# EAGLE board expand (EAGLE 5.10)
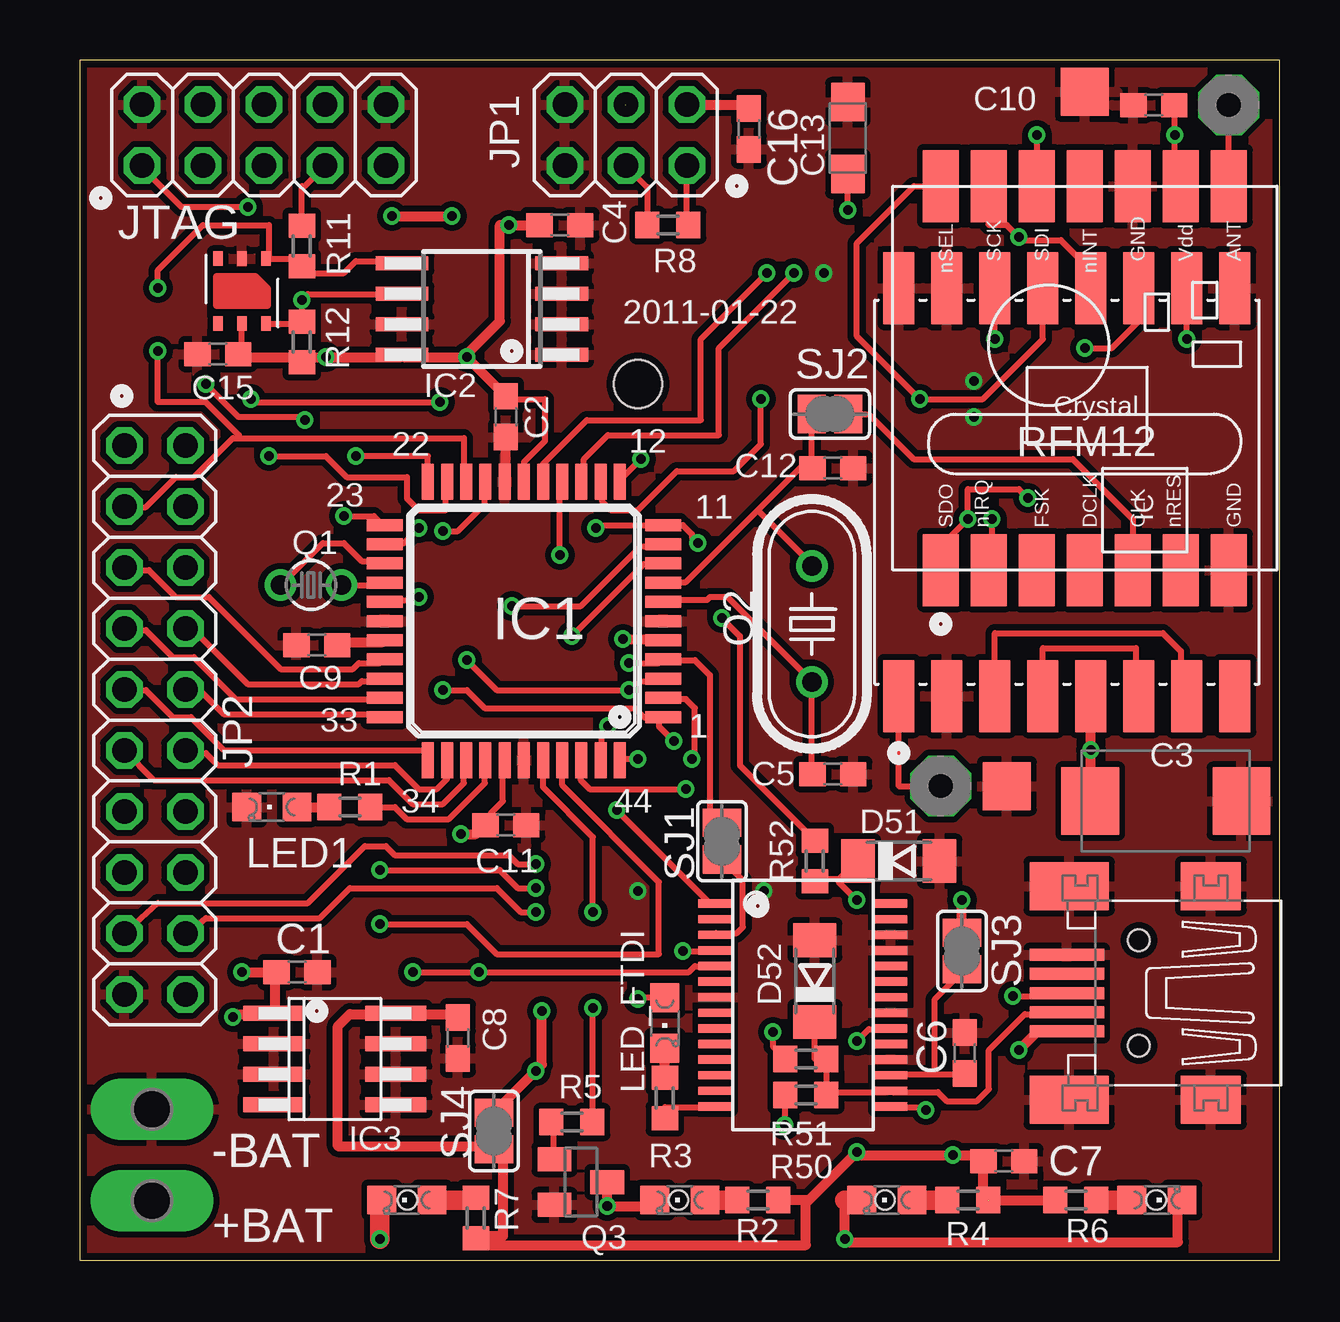
[diagram p0: board, top side]
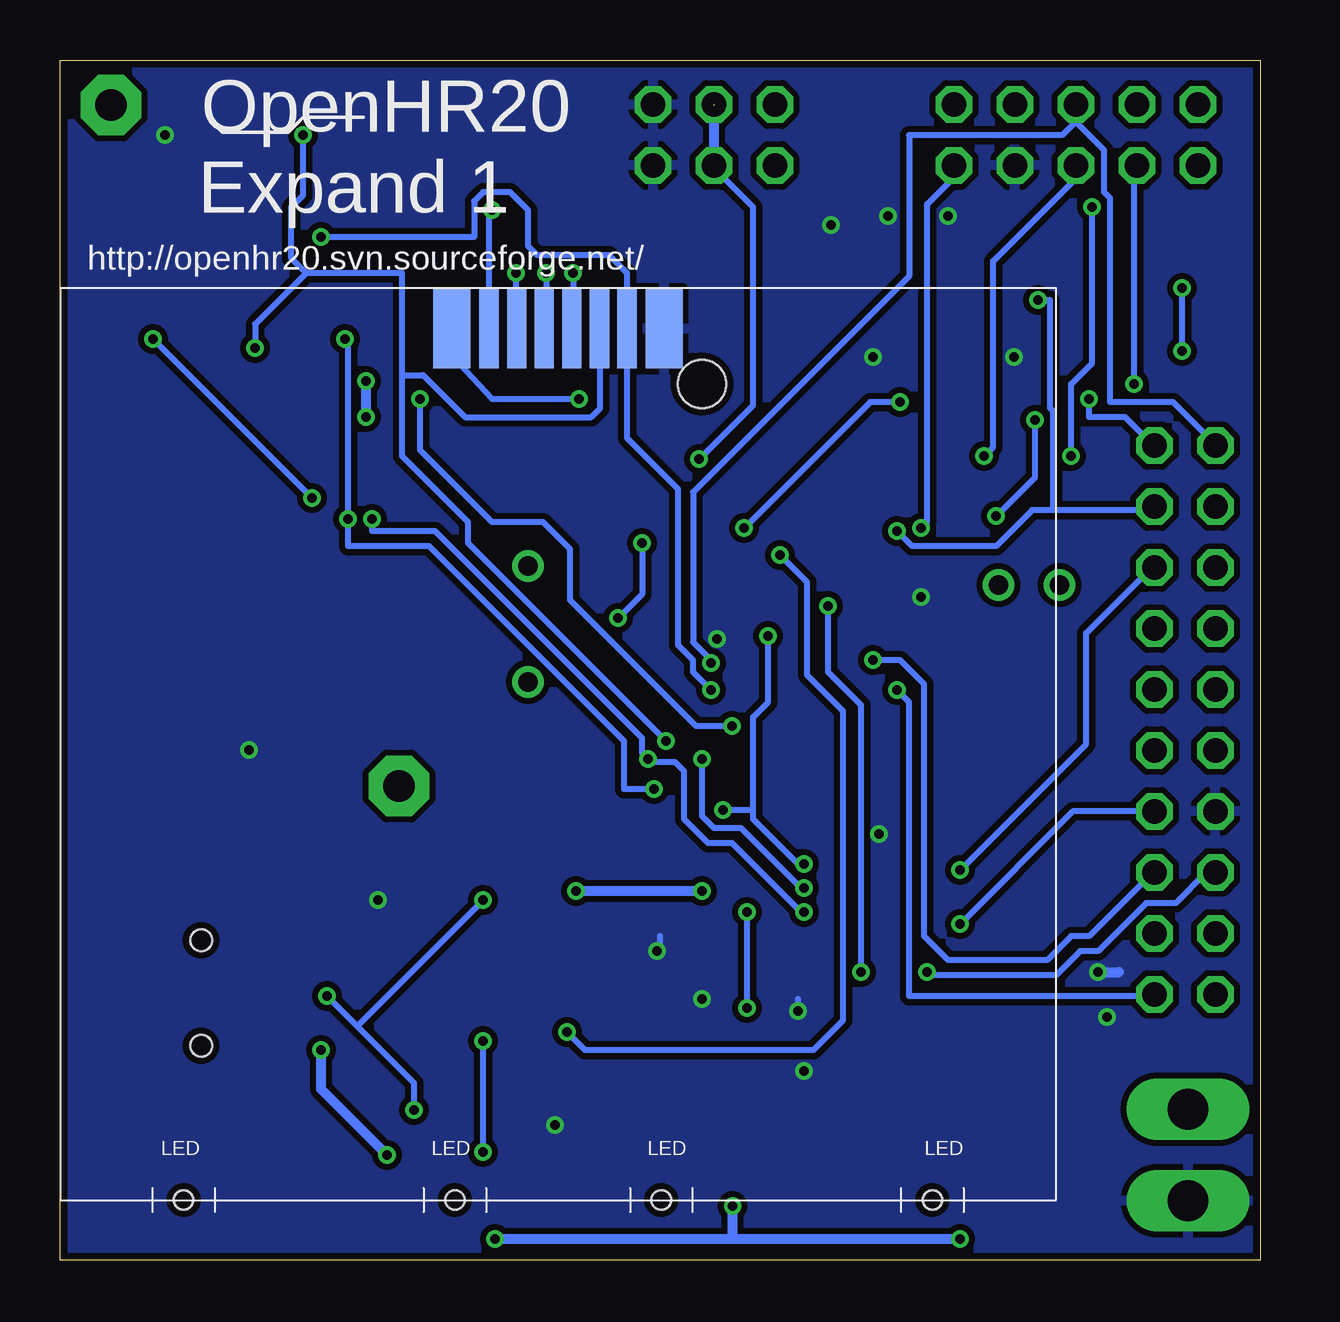
[diagram p1: board, bottom side, seen from below]

Size 50 x 50 mm. Coordinates in mm from the lower left corner, seen from the top.
Outline: 0,0 50,0 50,50 0,50 0,0
Copper layers (1*16): Top 0.035mm / dielectric 1.5mm / Bottom 0.035mm
Design rules "rules": minimum track width 10mil, minimum drill 16mil, track to track 10mil, track to pad 10mil, pad to pad 10mil, via to via 10mil, smd to smd 0mil, copper to edge 12mil, drill to drill 12mil, minimum pad ring 10mil, minimum via ring 6mil, stop-mask expansion 2mil, vias tented up to drill 100mil, thermal gap 10mil

## Footprints (pad centres in the part's own frame; a part is rotated, then mirrored left to right if it is on the bottom)
PAD-01 = drill 1.3 pad 2.54 octagon: 1 0,0
TP20SQ = smd 2 x 2: TP 0,0
P2-38-17 = drill 1.702 pad 2.121 long: TP-1 -1.905,0; TP-2 1.905,0
C0603 = smd 1.1 x 1: 1 -0.85,0; 2 0.85,0
SMC_D = smd 2.4 x 2.8: + -3.15,0; - 3.15,0
SMC_A = smd 1.6 x 1.4: + -1.5,0; - 1.5,0
SOD80C = smd 1.4 x 1.8: A 1.7,0; C -1.7,0
TQFP44 = smd 1.5 x 0.5: 1 -5.8,4; 2 -5.8,3.2; 3 -5.8,2.4; 4 -5.8,1.6; 5 -5.8,0.8; 6 -5.8,0; 7 -5.8,-0.8; 8 -5.8,-1.6; 9 -5.8,-2.4; 10 -5.8,-3.2; 11 -5.8,-4; 23 5.8,-4; 24 5.8,-3.2; 25 5.8,-2.4; 26 5.8,-1.6; 27 5.8,-0.8; 28 5.8,0; 29 5.8,0.8; 30 5.8,1.6; 31 5.8,2.4; 32 5.8,3.2; 33 5.8,4 | smd 0.5 x 1.5: 12 -4,-5.8; 13 -3.2,-5.8; 14 -2.4,-5.8; 15 -1.6,-5.8; 16 -0.8,-5.8; 17 0,-5.8; 18 0.8,-5.8; 19 1.6,-5.8; 20 2.4,-5.8; 21 3.2,-5.8; 22 4,-5.8; 34 4,5.8; 35 3.2,5.8; 36 2.4,5.8; 37 1.6,5.8; 38 0.8,5.8; 39 0,5.8; 40 -0.8,5.8; 41 -1.6,5.8; 42 -2.4,5.8; 43 -3.2,5.8; 44 -4,5.8
SO-08M = smd 0.6 x 2.2: 1 -1.905,-3.33; 2 -0.635,-3.33; 3 0.635,-3.33; 4 1.905,-3.33; 5 1.905,3.33; 6 0.635,3.33; 7 -0.635,3.33; 8 -1.905,3.33
SO08 = smd 0.635 x 2.54: 1 -1.905,-2.54; 2 -0.635,-2.54; 3 0.635,-2.54; 4 1.905,-2.54; 5 1.905,2.54; 6 0.635,2.54; 7 -0.635,2.54; 8 -1.905,2.54
2X03 = drill 1.016 octagon: 1 -2.54,-1.27; 2 -2.54,1.27; 3 0,-1.27; 4 0,1.27; 5 2.54,-1.27; 6 2.54,1.27
2X10 = drill 1.016 octagon: 1 -11.43,-1.27; 2 -11.43,1.27; 3 -8.89,-1.27; 4 -8.89,1.27; 5 -6.35,-1.27; 6 -6.35,1.27; 7 -3.81,-1.27; 8 -3.81,1.27; 9 -1.27,-1.27; 10 -1.27,1.27; 11 1.27,-1.27; 12 1.27,1.27; 13 3.81,-1.27; 14 3.81,1.27; 15 6.35,-1.27; 16 6.35,1.27; 17 8.89,-1.27; 18 8.89,1.27; 19 11.43,-1.27; 20 11.43,1.27
2X05 = drill 1.016 octagon: 1 -5.08,-1.27; 2 -5.08,1.27; 3 -2.54,-1.27; 4 -2.54,1.27; 5 0,-1.27; 6 0,1.27; 7 2.54,-1.27; 8 2.54,1.27; 9 5.08,-1.27; 10 5.08,1.27
CHIPLED_0805 = smd 1.2 x 1.2: A 0,-1.05; C 0,1.05
TC26V = drill 0.813 round: 1 -1.27,0; 2 1.27,0
HC49U-V = drill 0.813 round: 1 -2.413,0; 2 2.413,0
SOT23-BEC = smd 1 x 1.4: B -0.95,-1.1; C 0,1.1; E 0.95,-1.1
R0603 = smd 1 x 1.1: 1 -0.85,0; 2 0.85,0
SJ = smd 1.168 x 1.6: 1 -0.762,0; 2 0.762,0
SSOP28DB = smd 0.348 x 1.397: 1 -4.225,-3.656; 2 -3.575,-3.656; 3 -2.925,-3.656; 4 -2.275,-3.656; 5 -1.625,-3.656; 6 -0.975,-3.656; 7 -0.325,-3.656; 8 0.325,-3.656; 9 0.975,-3.656; 10 1.625,-3.656; 11 2.275,-3.656; 12 2.925,-3.656; 13 3.575,-3.656; 14 4.225,-3.656; 15 4.225,3.656; 16 3.575,3.656; 17 2.925,3.656; 18 2.275,3.656; 19 1.625,3.656; 20 0.975,3.656; 21 0.325,3.656; 22 -0.325,3.656; 23 -0.975,3.656; 24 -1.625,3.656; 25 -2.275,3.656; 26 -2.925,3.656; 27 -3.575,3.656; 28 -4.225,3.656
RFM12 = smd 1.5 x 3: 1 -5,-10; 2 -3,-10; 3 -1,-10; 4 1,-10; 5 3,-10; 6 5,-10; 7 7,-10; 8 7,6; 9 5,6; 10 3,6; 11 1,6; 12 -1,6; 13 -3,6; 14 -5,6
RFM22-XXX-S2 = smd 3 x 1.3: 1 -8.5,7; 2 -8.5,5; 3 -8.5,3; 4 -8.5,1; 5 -8.5,-1; 6 -8.5,-3; 7 -8.5,-5; 8 -8.5,-7; 9 8.5,-7; 10 8.5,-5; 11 8.5,-3; 12 8.5,-1; 13 8.5,1; 14 8.5,3; 15 8.5,5; 16 8.5,7
SHT21 = smd 0.6 x 0.4: NC1 1.35,1; NC2 -1.35,1; SCL -1.35,-1; SDA 1.35,-1; VDD -1.35,0; VSS 1.35,0
LPH7677 = smd 1.55 x 3.3: 1VDD 4.425,17.3; 8RES -4.425,17.3 | smd 0.8 x 3.3: 2SCLK 2.875,17.3; 3SDIN 1.725,17.3; 4D/C 0.575,17.3; 5SCE -0.575,17.3; 6GND -1.725,17.3; 7VOUT -2.875,17.3 | hole 2: 6,15 | hole 0.8: -15.6,-19; -4.3,-19; 4.3,-19; 15.6,-19
32005-301 = smd 3.1 x 0.5: 1 3,1.6; 2 3,0.8; 3 3,0; 4 3,-0.8; 5 3,-1.6 | smd 2.5 x 2: M1 -3,-4.45; M2 -3,4.45 | smd 3.3 x 2: M3 2.9,4.45; M4 2.9,-4.45 | hole 0.9: 0,2.2; 0,-2.2

## Placement (x,y rotation side)
ANT1  ANT  [PAD-01]  47.88,48.12 0 top
ANT2  ANT  [PAD-01]  35.88,19.75 0 top
ANT_GND  TPTP20SQ  [TP20SQ]  41.88,48.67 0 top
ANT_GND1  TPTP20SQ  [TP20SQ]  38.62,19.75 0 top
BAT  TP2P2-38-17  [P2-38-17]  3,4.38 90 top
C1  100n  [C0603]  9.05,12 0 top
C2  100n  [C0603]  17.75,35.14 270 top
C3  47u  [SMC_D]  45.25,19.12 0 top
C4  100n  [C0603]  20,43.12 0 top
C5  18p  [C0603]  31.38,20.25 0 top
C6  100n  [C0603]  36.88,8.62 90 top
C7  100n  [C0603]  38.5,4.12 0 top
C8  100n  [C0603]  15.75,9.25 270 top
C9  100n  [C0603]  9.88,25.62 0 top
C10  100n  [C0603]  44.75,48.12 0 top
C11  100n  [C0603]  17.75,18.12 0 top
C12  18p  [C0603]  31.38,33 180 top
C13  4u7  [SMC_A]  32,46.75 90 top
C15  100n  [C0603]  5.75,37.75 180 top
C16  100n  [C0603]  27.88,47.12 270 top
D51  BZV55C36  [SOD80C]  34.12,16.62 0 top
D52  BZV55C36  [SOD80C]  30.62,11.62 90 top
IC1  MEGA32-A  [TQFP44]  18.5,26.62 180 top
IC2  24Cxx  [SO-08M]  16.75,39.62 90 top
IC3  LE33CD  [SO08]  10.62,8.38 270 top
JP1  1WIRE  [2X03]  22.75,46.88 180 top
JP2  M05X2PTH  [2X10]  3.12,22.5 270 top
JTAG  M05X2PTH  [2X05]  7.67,46.88 0 top
LED1  [CHIPLED_0805]  8,18.88 90 top
LED3  [CHIPLED_0805]  25,2.5 90 top
LED4  [CHIPLED_0805]  33.62,2.5 90 top
LED5  [CHIPLED_0805]  44.88,2.5 270 top
LED6  [CHIPLED_0805]  13.62,2.5 90 top
LED_FTDI  RX/TX  [CHIPLED_0805]  24.38,9.88 180 top
Q1  32768Hz  [TC26V]  9.62,28.12 0 top
Q2  [HC49U-V]  30.5,26.5 270 top
Q3  BC817-25SMD  [SOT23-BEC]  20.88,3.25 270 top
R1  [R0603]  11.25,18.88 0 top
R2  [R0603]  28.25,2.5 0 top
R3  [R0603]  24.38,6.75 270 top
R4  [R0603]  37,2.5 0 top
R5  4k7  [R0603]  20.5,5.75 180 top
R6  [R0603]  41.5,2.5 180 top
R7  [R0603]  16.5,1.75 270 top
R8  10k  [R0603]  24.5,43.12 0 top
R11  47k  [R0603]  9.25,42.25 270 top
R12  47k  [R0603]  9.25,38.25 90 top
R50  1k5  [R0603]  30.25,6.88 180 top
R51  68  [R0603]  30.25,8.38 180 top
R52  68  [R0603]  30.62,16.62 90 top
SJ1  RTS->RESET  [SJ]  26.75,17.45 90 top
SJ2  RFM_CLK  [SJ]  31.25,35.25 180 top
SJ3  FTDI_PWR  [SJ]  36.75,12.88 90 top
SJ4  BAT_PWR  [SJ]  17.25,5.38 270 top
U1  FT232RL  [SSOP28DB]  30.12,10.62 270 top
U$1  RFM12_SMDSMD  [RFM12]  40.88,38.75 0 top
U$2  RFM22  [RFM22-XXX-S2]  41.12,32 90 top
U$3  SHT21  [SHT21]  6.75,40.38 90 top
W1  LPH7677  [LPH7677]  29.25,21.5 0 bottom
X2  MINI-USB-SCHIELD-32005-301  [32005-301]  44.12,11.12 180 top

## Library data of the parts
ANT1 ANT2 = OpenHR20_master
ANT_GND ANT_GND1 BAT = testpad
C1-C12 C15 C16 R1-R8 R11 R12 R50-R52 = resistor
C13 = rcl
D51 D52 = diode
IC1 = atmel
IC2 = microchip
IC3 = lexxab
JP1 JP2 JTAG = pinhead
LED1 LED3-LED6 LED_FTDI = led
Q1 Q2 = crystal
Q3 = transistor-npn
SJ1-SJ4 = jumper
U1 = ftdichip-3
U$1 = rfm_12
U$2 = SparkFun
U$3 = sht21
W1 = lcd_n3200_lph7677
X2 = con-cypressindustries

## Nets
!RESET: IC1.4 JP2.1 JTAG.6 SJ1.2
CLK: SJ2.1 U$1.5
GND: ANT_GND1.TP ANT_GND.TP BAT.TP-2 C1.2 C2.2 C3.- C4.2 C5.2 C6.2 C7.2 C8.2 C9.1 C10.1 C11.2 C12.1 C13.- C15.2 C16.2 D51.A D52.A IC1.6 IC1.18 IC1.28 IC1.39 IC2.1 IC2.2 IC2.3 IC2.4 IC2.7 IC3.2 IC3.3 IC3.5 IC3.6 IC3.7 JP1.5 JP1.6 JP2.19 JTAG.2 JTAG.10 LED1.C Q3.E U1.7 U1.18 U1.21 U1.25 U1.26 U$1.7 U$1.10 U$2.2 U$2.9 U$2.15 U$2.16 U$3.VSS W1.6GND X2.5 X2.M1 X2.M2 X2.M3 X2.M4
INT0: IC1.11 JP2.2 R52.2
INT1_1W: IC1.12 JP1.3 JP1.4 R8.1
L_DC: IC1.16 W1.4D/C
L_RES: IC1.13 W1.8RES
LED1: IC1.40 R5.1
LED2: IC1.37 R1.2
N$1: LED3.A R2.1
N$2: Q3.B R5.2
N$3: LED4.A R4.1
N$4: LED5.A R6.1
N$5: U$2.4 U$2.6
N$6: C6.1 SJ3.1 U1.17
N$10: LED_FTDI.C R3.1
N$11: R3.2 U1.14
N$12: LED1.A R1.1
N$14: SJ1.1 U1.3
N$15: C9.2 IC1.29
N$16: U$2.3 U$2.7
N$17: ANT1.1 U$1.8
N$18: IC1.25 Q1.1
N$19: LED6.A R7.1
N$20: IC1.26 Q1.2
N$21: LED3.C LED4.C LED5.C LED6.C Q3.C
N$22: C13.+ W1.7VOUT
N$24: C5.1 IC1.7 Q2.2
N$25: ANT2.1 U$2.1
N$26: C12.2 IC1.8 Q2.1 SJ2.2
NIRQ: IC1.42 U$1.2 U$2.14
PA1: IC1.36 JP2.11
PA2: IC1.35 JP2.12
PA3: IC1.34 JP2.9
PA4: IC1.33 JP2.10
PA5: IC1.32 JP2.7
PA6: IC1.31 JP2.8
PA7: IC1.30 JP2.5
RXD: IC1.9 JP2.17 U1.1
SCK: IC1.3 JP2.16 U$1.13 U$2.12 W1.2SCLK
SCL: IC1.19 IC2.6 JP2.4 R12.2 U$3.SCL
SDA: IC1.20 IC2.5 JP2.3 R11.2 U$3.SDA
SDI: IC1.1 JP2.20 U$1.12 U$2.11 W1.3SDIN
SDO: IC1.2 JP2.18 U$1.1 U$2.10
SEL1: IC1.43 U$1.14 U$2.13
SEL2: IC1.14 W1.5SCE
SEL3: IC1.44 JP2.6
T1: IC1.41 JP2.14
TCK: IC1.21 JTAG.1
TDI: IC1.24 JTAG.9
TDO: IC1.23 JTAG.3
TMS: IC1.22 JTAG.5
TXD: IC1.10 JP2.15 U1.5
USBDM: D52.C R50.1 R51.1 U1.16 X2.2
USBDP: D51.C R52.1 U1.15 X2.3
V_USB: C7.1 C8.1 IC3.8 R2.2 R4.2 R6.2 R7.2 SJ4.2 U1.20 X2.1
VCC: BAT.TP-1 C1.1 C2.1 C3.+ C4.1 C10.2 C11.1 C15.1 C16.1 IC1.5 IC1.17 IC1.27 IC1.38 IC2.8 IC3.1 JP1.1 JP1.2 JP2.13 JTAG.7 LED_FTDI.A R8.2 R11.1 R12.1 R50.2 SJ3.2 SJ4.1 U1.4 U$1.9 U$2.5 U$3.VDD W1.1VDD
VUSB1: IC1.15 R51.2

## Tracks (layer width: path | path; a pad name or v marks a point on that pad's centre or on a via)
!RESET  (via drill 0.41)
  Top 0.254: v22.88,24.88 24.12,24.88 24.25,25 IC1.4 24.32,25 25.62,25 26.25,24.38 26.25,18.71 SJ1.2
  Bottom 0.254: JP2.1 1.88,34 3.62,35.75 6.25,35.75 6.25,44.25 6.5,44.5 6.5,46.25 7.62,47.38 7.62,48.25 JTAG.6 7.75,48.25 7.75,47.38 8.25,46.88 14.62,46.88 14.62,41 23.62,32 23.62,25.75 22.88,25 v22.88,24.88
CLK
  Top 0.254: SJ2.1 32.88,35.25 34.75,33.38 41.38,33.38 43.88,30.88 U$1.5
GND  (via drill 0.41)
  Top 0.254: IC1.18 17.75,32.42 | U$1.10 43.88,43.88
  Top 0.406: 17.75,32.42 C2.2
  Bottom 0.254: v31,41.12 31,38.88 W1.6GND
  Bottom 0.406: v37.25,35.12 v37.25,36.62 | v23.25,15.38 v28.5,15.38
  pour Top: 0,50 50,50 50,0 0,0
INT0  (via drill 0.41)
  Top 0.254: v26.75,26.75 27.5,26 27.5,20.62 30.62,17.5 R52.2 | v25.75,29.88 25.5,30.12 25.5,30.25 25.12,30.62 IC1.11 21.62,30.62 v21.5,30.5 | v15,35.75 7.25,35.75 v7.12,35.88
  Bottom 0.254: v7.12,35.88 7.12,35.12 5.62,35.12 4.5,34 JP2.2 | v26.75,26.75 25.75,27.75 v25.75,29.88 | v15,35.75 16.25,35.75 v21.5,30.5
INT1_1W  (via drill 0.41)  (1 unrouted)
  Top 0.254: v23.38,33.38 22.5,32.5 IC1.12 | R8.1 23.65,44.7 JP1.4
  Bottom 0.254: v23.38,33.38 21.12,35.62 21.12,43.88 22.25,45 JP1.4 22.75,45.62
  Bottom 0.406: 22.75,45.62 22.75,48.12
L_DC  (via drill 0.41)
  Top 0.254: v28.62,41.12 25.88,38.38 25.88,35 21.12,35 19.3,33.17 IC1.16
  Bottom 0.254: W1.4D/C 28.62,38.75 v28.62,41.12
L_RES  (via drill 0.41)
  Top 0.254: IC1.13 21.75,32.38 21.75,31.62 22.12,31.25 23.25,31.25 24.88,32.88 27.25,32.88 28.38,34 v28.38,35.88
  Bottom 0.254: v28.38,35.88 32,35.88 33.62,37.62 33.62,38.75 W1.8RES
LED1  (via drill 0.41)
  Top 0.254: IC1.40 19.3,19.7 21.38,17.62 v21.38,14.5 | v21.38,10.5 21.38,5.78 R5.1
  Bottom 0.254: v21.38,10.5 v21.38,14.5
LED2
  Top 0.254: R1.2 13.12,18.88 13.62,18.38 15.38,18.38 16.88,19.88 16.88,20.8 IC1.37
N$1
  Top 0.813: LED3.A R2.1
N$2
  Top 0.254: Q3.B 19.75,4.25 | Q3.B 19.75,4.38 | Q3.B 19.75,4.5 | R5.2 19.75,5.75 19.75,4.62 Q3.B
N$3
  Top 0.254: LED4.A 34.62,2.5
  Top 0.813: 34.62,2.5 R4.1
N$4
  Top 0.813: R6.1 LED5.A
N$5
  Top 0.254: U$2.4 40.12,25.5 44,25.5 44,24.38 44.12,24.25 U$2.6
N$6
  Top 0.254: 35.62,7.75 33.88,7.75 U1.17 | 35.62,7.75 36.88,7.75 C6.1 | SJ3.1 36.75,12 35.62,10.88 35.62,7.75
N$10
  Top 0.406: R3.1 LED_FTDI.C
N$11
  Top 0.254: R3.2 24.38,6.38 26.38,6.38 U1.14
N$12
  Top 0.406: LED1.A R1.1
N$14
  Top 0.254: U1.3 26.5,13.62 27.38,13.62 27.62,13.88 27.62,15.81 SJ1.1
N$15
  Top 0.254: 10.88,25.75 10.75,25.62 C9.2 | 12.62,25.75 IC1.29
  Top 0.406: 10.88,25.75 12.62,25.75
N$16
  Top 0.254: U$2.3 38.12,26.12 45.12,26.12 45.88,25.38 45.88,23.5 U$2.7
N$17
  Top 0.254: U$1.8 ANT1.1
N$18
  Top 0.254: IC1.25 12.62,29.12 11.75,29.12 11,29.88 10.12,29.88 8.38,28.12 Q1.1
N$19
  Top 0.813: LED6.A 16.4,2.5 R7.1
N$20
  Top 0.254: IC1.26 12.62,28.12 Q1.2
N$21  (via drill 0.41)
  Top 0.254: 45.75,2.5 LED5.C | 24.12,2.25 LED3.C | v31.88,0.88 32,0.75
  Top 0.406: 45.75,2.5 45.75,0.75 32,0.75 | Q3.C v21.98,2.25 24.12,2.25 | v31.88,0.88 31.88,2.5
  Top 0.813: 31.88,2.5 LED4.C | LED6.C 12.5,2.25 v12.5,0.88
  Bottom 0.254: 22,0.88 21.98,0.9
  Bottom 0.406: v12.5,0.88 22,0.88 v31.88,0.88 | 21.98,0.9 v21.98,2.25
N$22  (via drill 0.41)
  Top 0.254: v32,43.75 C13.+
  Bottom 0.254: v32,43.75 32.12,43.62 W1.7VOUT
N$24
  Top 0.254: C5.1 30.5,20.25 Q2.2 30.5,24.12 27,27.62 26.25,27.62 26.12,27.5 24.38,27.5 IC1.7
N$25
  Top 0.254: U$2.1 34.12,19.75 ANT2.1
N$26
  Top 0.254: 24.38,28.25 IC1.8 24.5,28.25 25.25,28.25 28.25,31.25 | SJ2.2 30.5,33 C12.2 30.38,33.38 28.25,31.25 | 28.25,31.25 30.5,29 Q2.1
NIRQ  (via drill 0.41)
  Top 0.254: v38.12,38.38 U$2.14 | IC1.42 21,20.75 20.88,20.62 20.88,20 21.25,19.62 v25.25,19.62 | v38,30.88 38,28.88 37.88,28.88 U$1.2 37.88,27.88 38,28 v38,30.88
  Bottom 0.254: v38.12,38.38 38,38.25 v38,30.88 38,29.75 34.62,29.75 26.5,21.62 26.5,19.62 v25.25,19.62
PA1
  Top 0.254: IC1.36 16,20.73 16,19.88 15.12,19 13.88,19 12.88,20 3.08,20 JP2.11
PA2
  Top 0.254: 15.25,20.75 IC1.35 15.3,20.05 14.88,19.62 14.12,19.62 13.12,20.62 5.75,20.62 5.25,21.12 4.5,21.12 JP2.12
PA3
  Top 0.254: 14.5,20.88 IC1.34 14.5,21.25 6,21.25 4.62,22.62 3.88,22.62 2.75,23.75 1.88,23.75 JP2.9
PA4
  Top 0.254: IC1.33 12.62,22.62 12.5,22.75 6,22.75 5,23.75 4.5,23.75 JP2.10
PA5
  Top 0.254: IC1.32 12.62,23.38 6.5,23.38 4.75,25.12 3.88,25.12 2.75,26.25 1.88,26.25 JP2.7
PA6
  Top 0.254: IC1.31 12.62,24.12 11.75,24.12 11.62,24 7,24 4.75,26.25 4.5,26.25 JP2.8
PA7
  Top 0.254: IC1.30 12.62,25 12.5,24.88 11.62,24.88 11.38,24.62 8.38,24.62 5.38,27.62 4,27.62 2.88,28.75 1.88,28.75 JP2.5
RXD  (via drill 0.41)
  Top 0.254: 26.38,14.88 U1.1 26.25,14.88 v22.38,18.75 | IC1.9 24.25,29 23.5,29 v20.5,26 | JP2.17 1.88,13.62 3.25,14.88 9.5,14.88 11.88,17.25 12.75,17.25 13.12,16.88 17.88,16.88 18.25,16.5 v19,16.5
  Bottom 0.254: v20.5,26 20.5,23.25 21.12,22.62 21.12,18.75 | v19,16.5 19.25,16.5 21.12,18.38 21.12,18.75 | 21.12,18.75 v22.38,18.75
SCK  (via drill 0.41)
  Top 0.254: U$1.13 37.88,43.12 38.62,43.12 v39.12,42.62 39.25,42.5 40.88,42.5 42.12,41.25 U$2.12 | IC1.3 24.25,24.12 23.38,24.12 23.25,24 22.88,24 v22.88,23.75 17.38,23.75 v16.12,25
  Bottom 0.254: JP2.16 4.5,16.12 7.12,13.5 7.88,13.5 8.88,12.5 13,12.5 14,13.5 14,24 15,25 v16.12,25 | v39.12,42.62 32.75,42.62 32.75,44.12 32.38,44.5 31.25,44.5 30.5,43.75 30.5,42.25 30.12,41.88 27.12,41.88 26.38,41.12 W1.2SCLK 26.38,34.25 24.25,32.12 24.25,25.62 23.62,25 23.62,24.5 v22.88,23.75
SCL  (via drill 0.41)
  Top 0.254: U$3.SCL 7.75,39 9.25,39 R12.2 | R12.2 9.38,39.12 | IC2.6 13.38,40.25 9.5,40.25 v9.25,40 R12.2 | v15.12,30.38 15.75,30.38 16.88,31.5 16.88,32.38 IC1.19
  Bottom 0.254: v15.12,30.38 14.5,29.75 11,29.75 9.5,31.25 8.62,31.25 | 8.62,31.25 4.5,31.25 4.5,31.38 JP2.4 | 8.62,31.25 8.62,35.38 8.75,35.5 8.75,40 v9.25,40
SDA  (via drill 0.41)
  Top 0.254: U$3.SDA 7.75,41.62 | IC2.5 13.38,41.62 11.5,41.62 11,41.12 9.62,41.12 9.35,41.4 R11.2 8.93,41.73 U$3.SDA | 6.62,34.25 6.38,34.25 4.75,32.62 4,32.62 2.75,31.38 1.88,31.38 JP2.3 | 6.62,34.25 16,34.25 16,32.5 IC1.20 | U$3.SDA 7.88,41.75 7.88,43.12 5.12,43.12 3.25,41.25 v3.25,40.5 | 6.62,34.25 6.62,34.38 5.25,35.75 3.25,35.75 v3.25,37.88
  Bottom 0.254: v3.25,37.88 v3.25,40.5
SDI  (via drill 0.41)
  Top 0.254: v39.88,46.88 U$1.12 | v15.12,23.75 16.12,23.75 16.88,23 23.12,23 23.5,22.62 IC1.1 24.12,22.5 24.12,22.25 v24.75,21.62 | U$2.11 44.12,39.12 43,38 v41.88,38
  Bottom 0.254: JP2.20 4.5,11 14.62,11 14.62,23.25 v15.12,23.75 | W1.3SDIN 27.5,38.75 27.5,35.5 27.88,35.12 33.12,35.12 34.88,36.88 35.75,36.88 | v24.75,21.62 33,29.88 33,30.75 35.75,33.5 35.75,36.88 | 39.75,41.12 40.38,41.75 40.38,43.88 39.88,44.38 v39.88,46.88 | v41.88,38 41.88,39 39.75,41.12 | 39.75,41.12 35.75,41.12 35.75,36.88
SDO  (via drill 0.41)
  Top 0.254: v46.12,38.38 U$2.10 | U$1.1 35.88,29.75 v37,30.88 37,32.12 39.12,32.12 v39.5,31.75 | JP2.18 4.5,13.62 5.25,14.25 10,14.25 11.25,15.5 17.38,15.5 18.38,14.5 v19,14.5 | IC1.2 24.38,23.38 25.25,23.38 25.62,23 25.62,21.12 v25.5,20.88
  Bottom 0.254: v37,30.88 37,30.38 34.38,30.38 25.75,21.75 25.75,21.12 v25.5,20.88 25.38,20.75 24.38,20.75 24,20.38 24,18.38 23,17.38 22,17.38 19.12,14.5 v19,14.5 | v39.5,31.75 v46.12,38.38
SEL1  (via drill 0.41)
  Top 0.254: U$2.13 40.12,38.38 37.62,35.88 v35,35.88 32.38,38.5 32.38,42.38 34.75,44.75 U$1.14 | IC1.43 21.75,20.88 21.75,22 v22,22.25
  Bottom 0.254: v22,22.25 23.5,22.25 28.75,27.5 28.75,29.62 29.88,30.75 32,30.75 35,33.75 v35,35.88
SEL2  (via drill 0.41)
  Top 0.254: IC1.14 21,32.5 21,33.38 22,34.38 26.62,34.38 26.62,38 v29.75,41.12
  Bottom 0.254: W1.5SCE 29.75,38.75 v29.75,41.12
SEL3  (via drill 0.41)
  Top 0.254: v23.25,20.88 22.5,20.88 IC1.44 | v12.5,16.25 17.5,16.25 18.25,15.5 v19,15.5
  Bottom 0.254: v12.5,16.25 7.25,21.5 7.25,26.12 4.5,28.88 JP2.6 | v23.25,20.88 23.25,18.5 22.75,18 21.62,18 19.12,15.5 v19,15.5
T1  (via drill 0.41)
  Top 0.254: IC1.41 20.1,19.77 24.12,15.75 24.12,12.75 17.38,12.75 16.12,14 v12.5,14
  Bottom 0.254: v12.5,14 7.81,18.69 JP2.14
TCK  (via drill 0.41)
  Top 0.254: v7,43.88 4.25,43.88 2.5,45.62 JTAG.1 | IC1.21 15.25,32.38 15.25,31.25 14.12,31.25 13.62,31.75 13.62,32.62 11.12,32.62 10.25,33.5 v7.88,33.5
  Bottom 0.254: v7.88,33.5 7.88,36.5 7,37.38 v7,43.88
TDI  (via drill 0.41)
  Top 0.254: v14.12,30.5 13.5,29.88 12.75,29.88 IC1.24
  Bottom 0.254: v14.12,30.5 13.88,30.75 13.88,44 12.75,45.12 JTAG.9
TDO  (via drill 0.41)
  Top 0.254: v9.38,35 9.25,35.12 6.62,35.12 v5.25,36.5 | IC1.23 12.62,30.62 12.25,31 v11,31
  Bottom 0.254: 9.38,34.75 v9.38,35 9.38,32.62 v11,31 | v5.25,36.5 5.25,45.62 JTAG.3
TMS  (via drill 0.41)
  Top 0.254: v11.5,33.5 14.5,33.5 IC1.22
  Bottom 0.254: JTAG.5 7.75,45.62 7.75,45 11.12,41.62 11.12,33.88 v11.5,33.5
TXD  (via drill 0.41)
  Top 0.254: U1.5 25.62,12.25 25.38,12 v16.62,12 v13.88,12 | IC1.10 24.25,29.75 23.38,29.75 20.88,27.25 v18,27.25
  Bottom 0.254: v16.62,12 16.62,23.12 18,24.5 v18,27.25 | JP2.15 2.23,16.15 3.5,14.88 4.75,14.88 6.75,12.88 7.5,12.88 8.5,11.88 13.75,11.88 v13.88,12
USBDM
  Top 0.254: U1.16 33.88,7 35.75,7 36.12,6.62 37.38,6.62 37.88,7.12 37.88,8.75 39.38,10.25 41.05,10.25 X2.2 41.12,10.25 | D52.C 30.62,8.38 R51.1 31.12,8.25 31.12,6.88 R50.1 31.25,7 33.62,7 U1.16 | U1.16 33.75,7
USBDP  (via drill 0.41)
  Top 0.254: X2.3 41,11 v38.88,11 | U1.15 33.88,6.38 35.12,6.38 v35.25,6.25 | 31.62,15.88 30.62,15.88 R52.1 | 31.62,15.88 32.38,16.62 D51.C | v32.38,15 31.62,15.75 31.62,15.88
  Bottom 0.254: 37.62,9.75 37.88,10 v38.88,11 | 37.62,9.75 v32.38,15 | v35.25,6.25 35.25,7.38 37.62,9.75
V_USB  (via drill 0.41)  (1 unrouted)
  Top 0.254: R6.2 41,2.5 | 33.75,9.62 U1.20 33.62,9.62 32.88,9.62 v32.38,9.12 | 39.88,9.5 41.12,9.5 X2.1 | C7.1 37.62,4.12 | 37.62,2.62 R4.2 | C7.1 37.75,4.38 | 37.5,4.38 37.5,4.25 C7.1 | v32.38,4.5 32.5,4.38 | SJ4.2 16.88,4.5 17.62,4.5 SJ4.2 | SJ4.2 16.75,4.62 | 16.88,0.62 16.5,0.88 R7.2 16.5,1 | SJ4.2 16.62,4.62 | 15.62,10.25 15.75,10.12 C8.1 | 13.25,10.25 IC3.8 13.12,10.25 | 16.62,4.75 SJ4.2
  Top 0.406: 37.88,2.5 R6.2 | 37.62,4.12 37.62,2.62 | 37.4,4.38 37.5,4.38 | 16.5,1 17.62,1 17.62,4.5 | 13.25,10.25 15.62,10.25 | 13.12,10.25 11.25,10.25 10.75,9.75 10.75,4.75 16.62,4.75 | 30.25,2.38 v32.38,4.5 | 16.88,0.62 30.25,0.62 30.25,2.38 | v39.12,8.75 39.88,9.5 | 32.5,4.38 v36.38,4.38 37.4,4.38 | 37.4,4.38 C7.1 | R2.2 30.25,2.5 30.25,2.38
  Bottom 0.254: 32.5,4.5 v32.38,4.5 v32.38,9.12
  Bottom 0.406: v39.12,8.75 39.12,7.12 v36.38,4.38
VCC  (via drill 0.41, 0.41 pad 0.61)
  Top 0.254: U$3.VDD 6.75,37.75 C15.1 6.75,37.62 | 9.12,37.62 9.25,37.5 R12.1 9.38,37.5 9.5,37.62 | C2.1 17.75,35.88 19.38,35.88 19.38,34.12 18.5,33.25 IC1.17 | 13.5,37.62 IC2.8 13.38,37.62 | U$2.5 42.12,22.75 | U$1.9 45.62,44.75 v45.62,46.88 45.62,48.12 C10.2 | 16.75,18 C11.1 17.12,18.23 17.12,18.62 17.62,19.12 17.62,20.75 IC1.38 | R11.1 9.25,44.75 9.38,44.75 10.25,45.62 JTAG.7 | v14.12,27.62 13.75,27.62 13.62,27.5 12.75,27.5 IC1.27 | v16.12,37.62 16.12,37.75 | 17.5,43.12 v17.88,43.12 | v13,43.5 12.88,43.5 | C3.+ 42.12,19.12 | 8.12,10.38 IC3.1 | v25.12,12.88 26.38,12.88 U1.4 | SJ4.1 16.88,6.25 | 36.75,13.62 SJ3.2 36.75,13.75 | v29.38,5.62 29.38,6.88 R50.2 | R8.2 25.29,43.19 JP1.2 | LED_FTDI.A 23.25,10.93 v23.25,10.88
  Top 0.406: 6.75,37.62 9.12,37.62 | C2.1 v16.12,37.62 13.5,37.62 | 9.5,37.62 v10.25,37.62 13.38,37.62 | v17.88,43.12 C4.1 | 16.12,37.75 17.5,39.12 17.5,43.12 | v13,43.5 v15.5,43.5 | 42.12,19.12 v42.12,21.25 U$2.5 | v19.25,10.38 19.25,8.14 SJ4.1 | IC1.5 24.25,25.88 v22.62,25.88 | SJ3.2 v36.75,15 | C16.1 27.7,48.15 JP1.1 | 16.75,18 16.5,17.75 v15.88,17.75 | v6.75,12 C1.1 8.12,12 8.12,10.38 | 7.88,10.25 6.5,10.25 v6.38,10.12
  Bottom 0.254: 25,13.5 25,13 v25.12,12.88 | v19.25,10.38 19.25,10.88
  Bottom 0.406: v6.75,12 5.88,12
  other vias: 19,7.88
  pour Bottom: 0,50 0,0 50,0 50,50
VUSB1  (via drill 0.41)
  Top 0.254: v28.88,9.5 28.88,8.9 R51.2 | v20,29.38 20,32.33 IC1.15
  Bottom 0.254: v28.88,9.5 28.12,8.75 18.62,8.75 17.38,10 17.38,22.88 18.88,24.38 18.88,28.25 v20,29.38

## Text on the board
_tsilk: 2011-01-22 | 22 | 12 | 23 | 11 | 33 | 1 | 34 | 44 | -BAT | -BAT | +BAT
_bsilk: OpenHR20 | Expand 1 | http://openhr20.svn.sourceforge.net/